# Altium PCB CRYO_ASIC_flex_40pin_adapter.PcbDoc
Units mm, origin at the board's own origin, x right, y up, seen from the top; angles counter-clockwise.
Board outline 49.2 x 49.2 mm, 2 copper layers (Top Layer, Bottom Layer), stack 0.747 mm thick; 8 components, 60 nets, 192 pads, 133 vias.
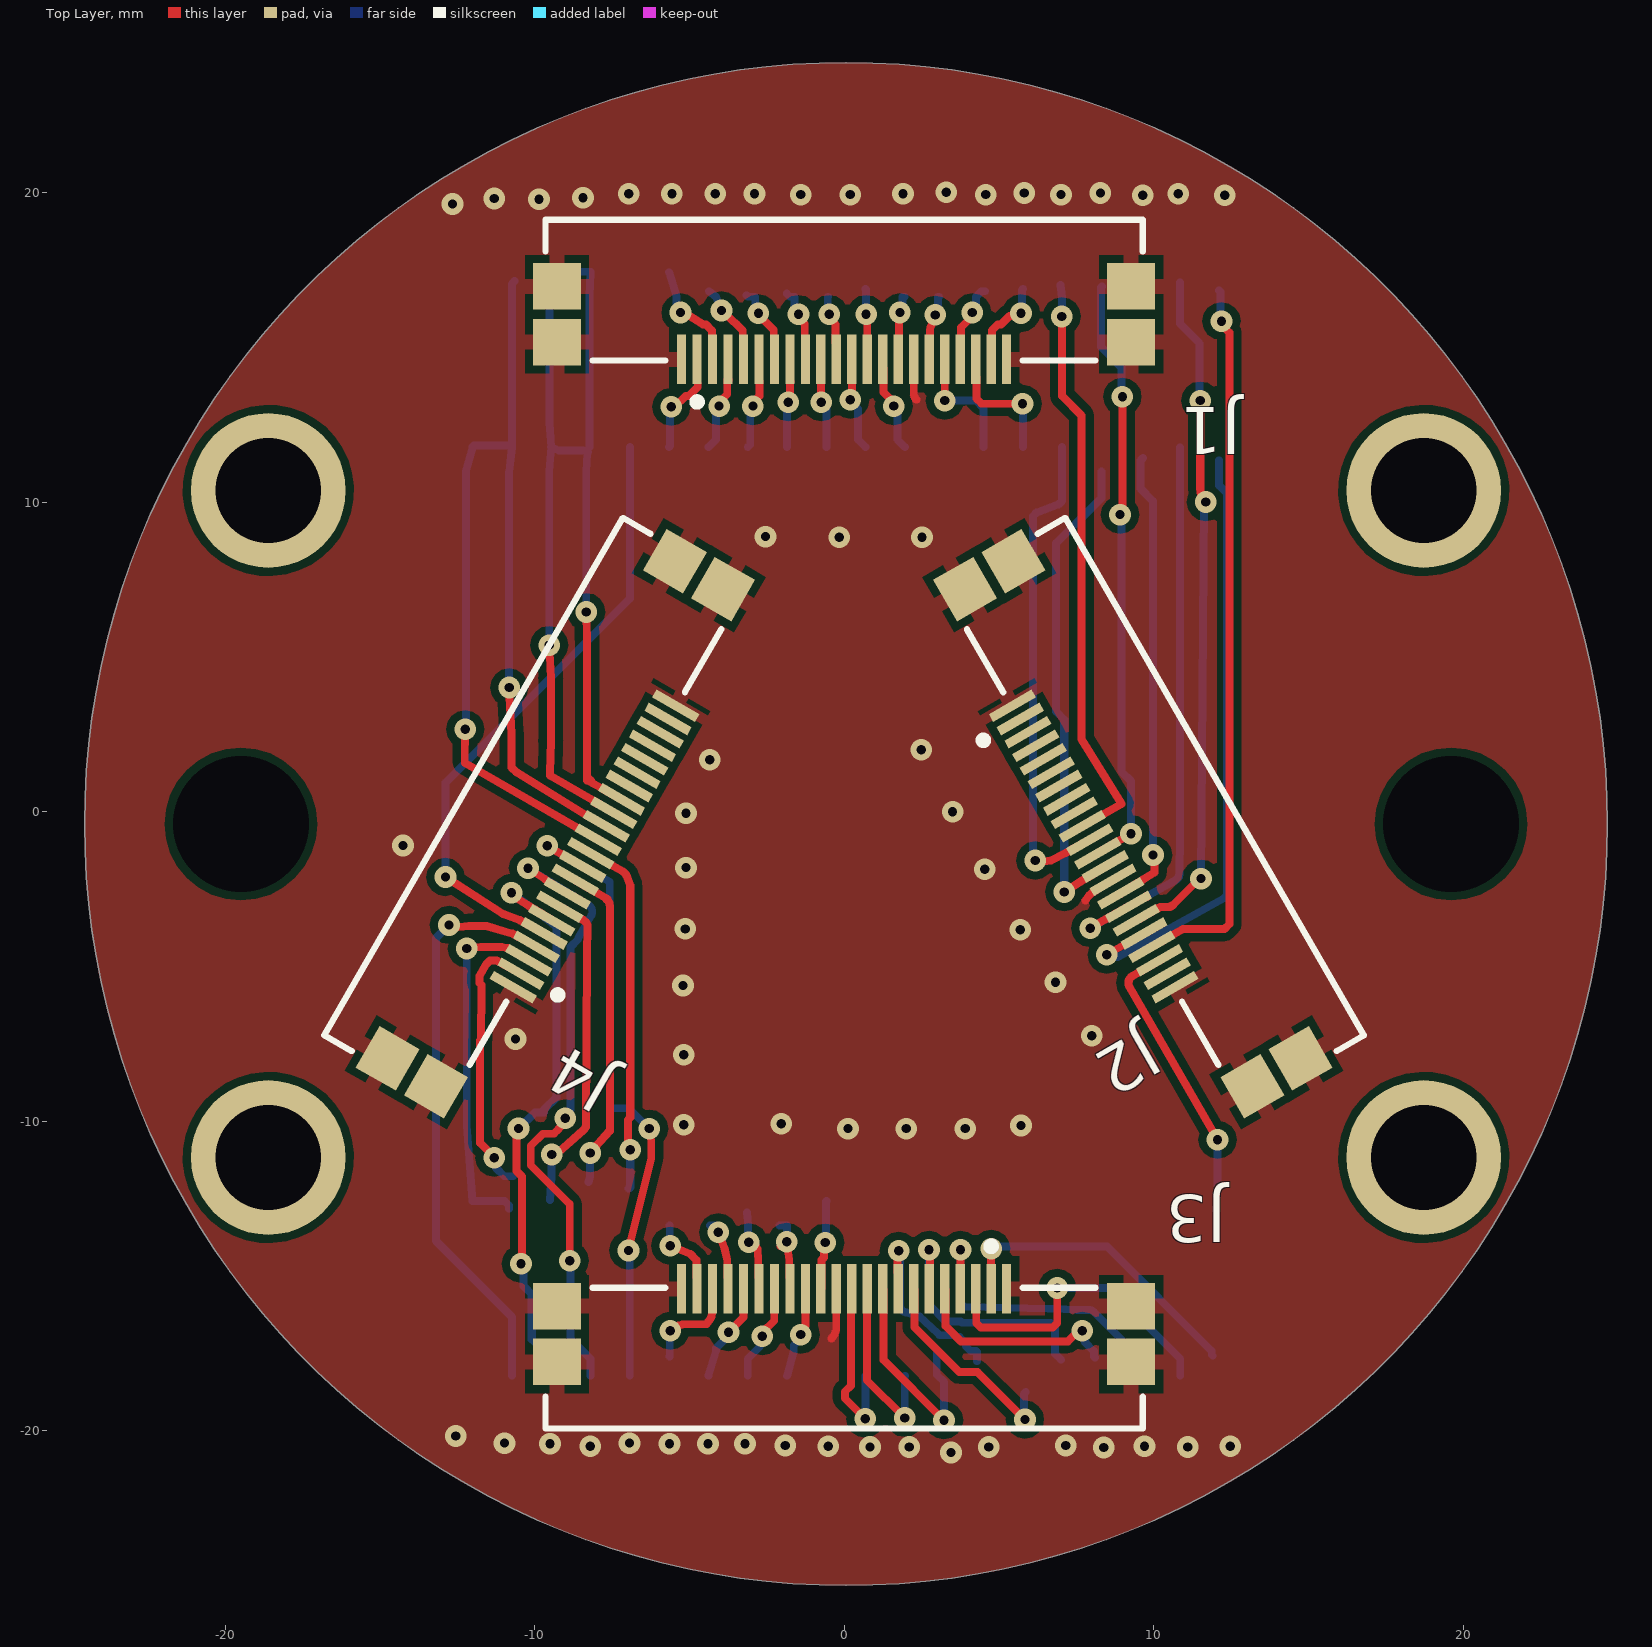
[diagram p0: Top Layer view]
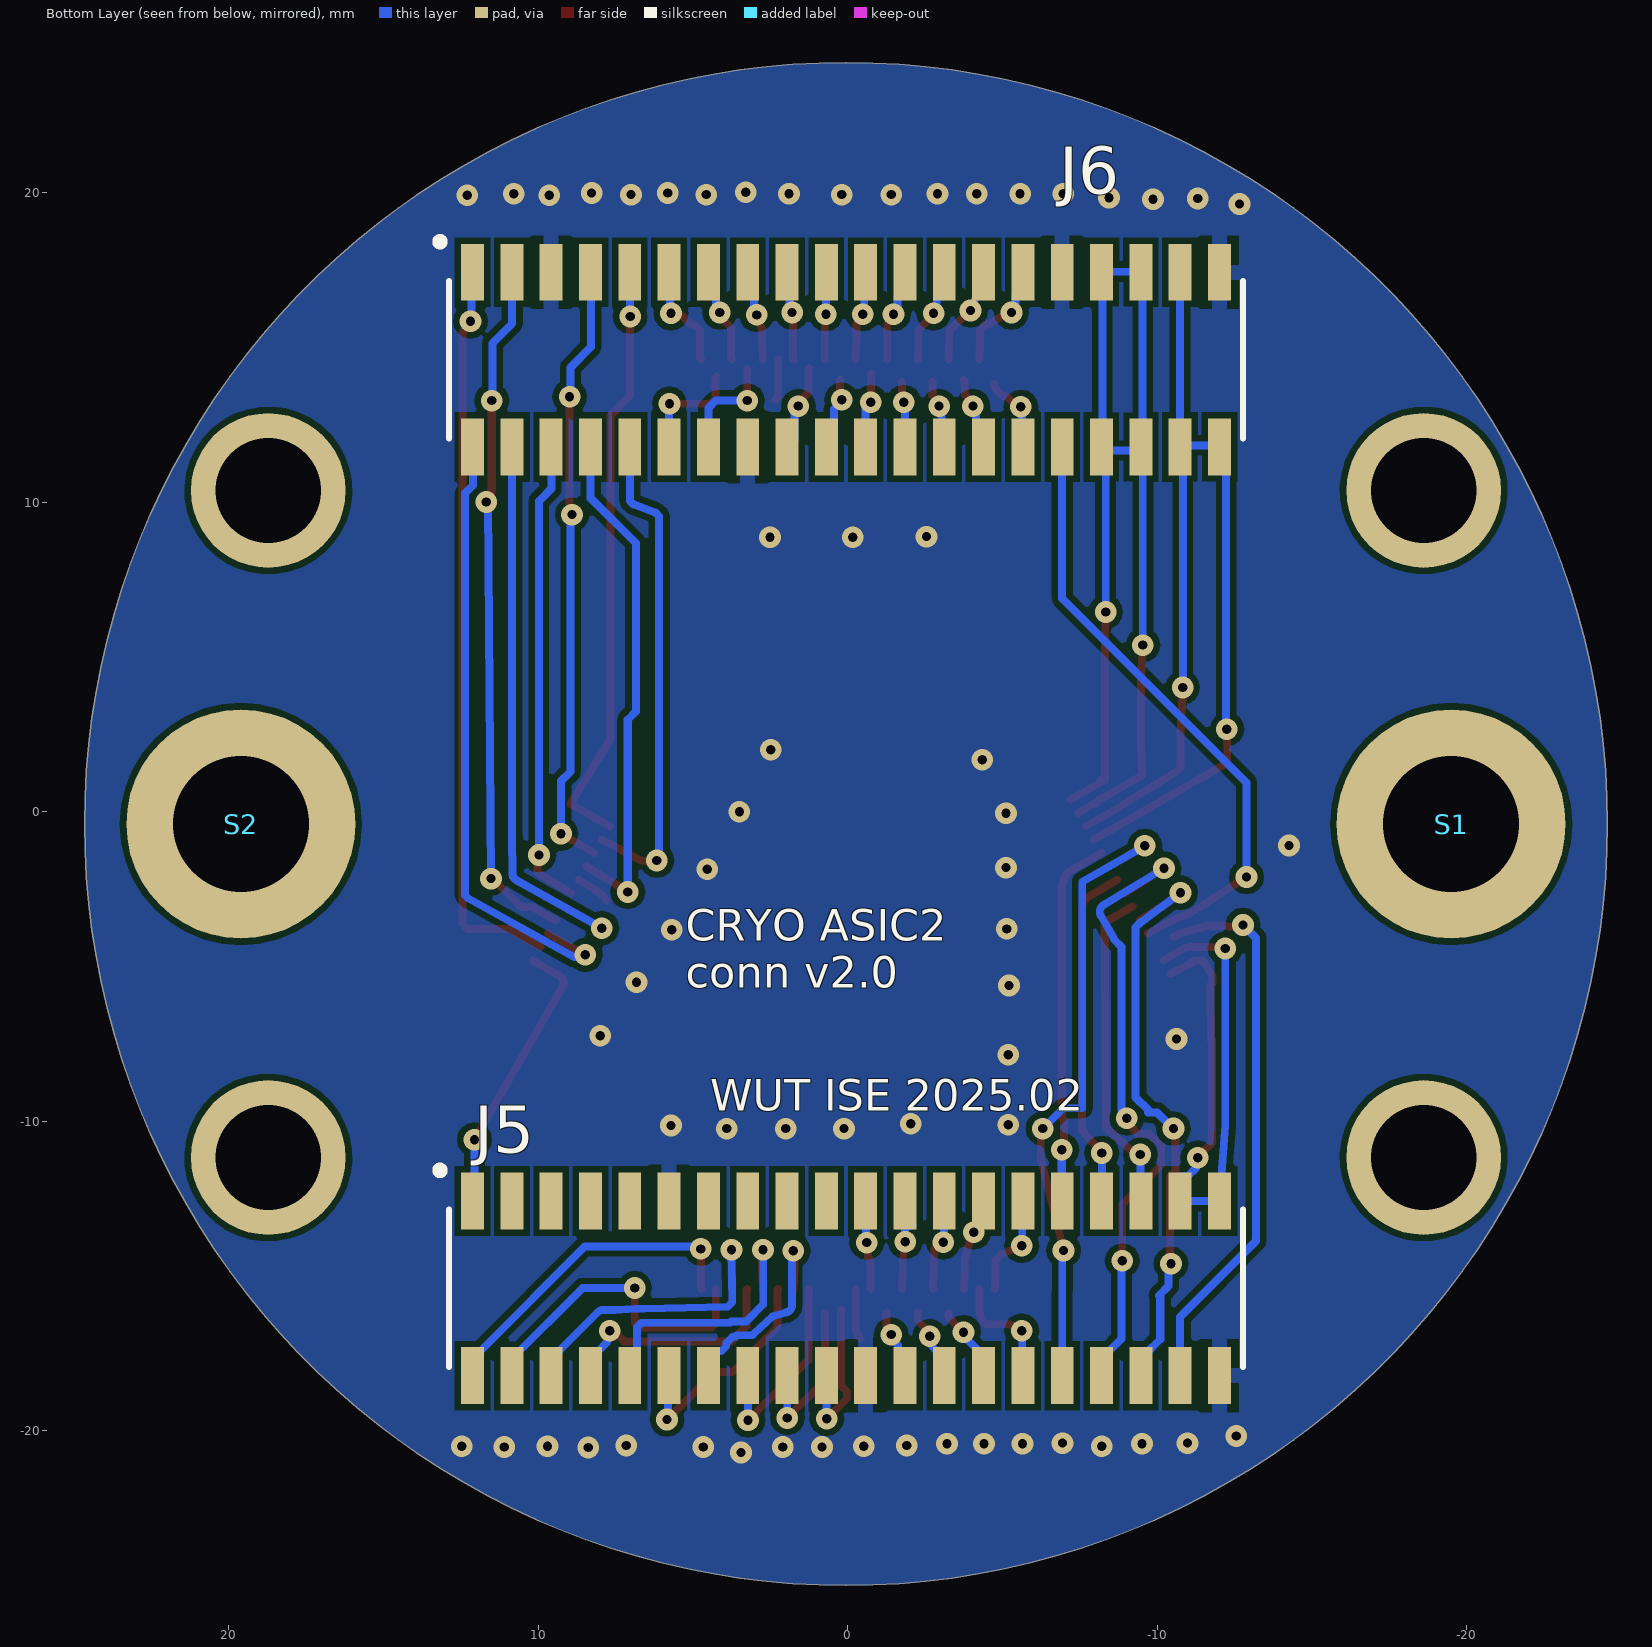
[diagram p1: Bottom Layer view, seen from below]
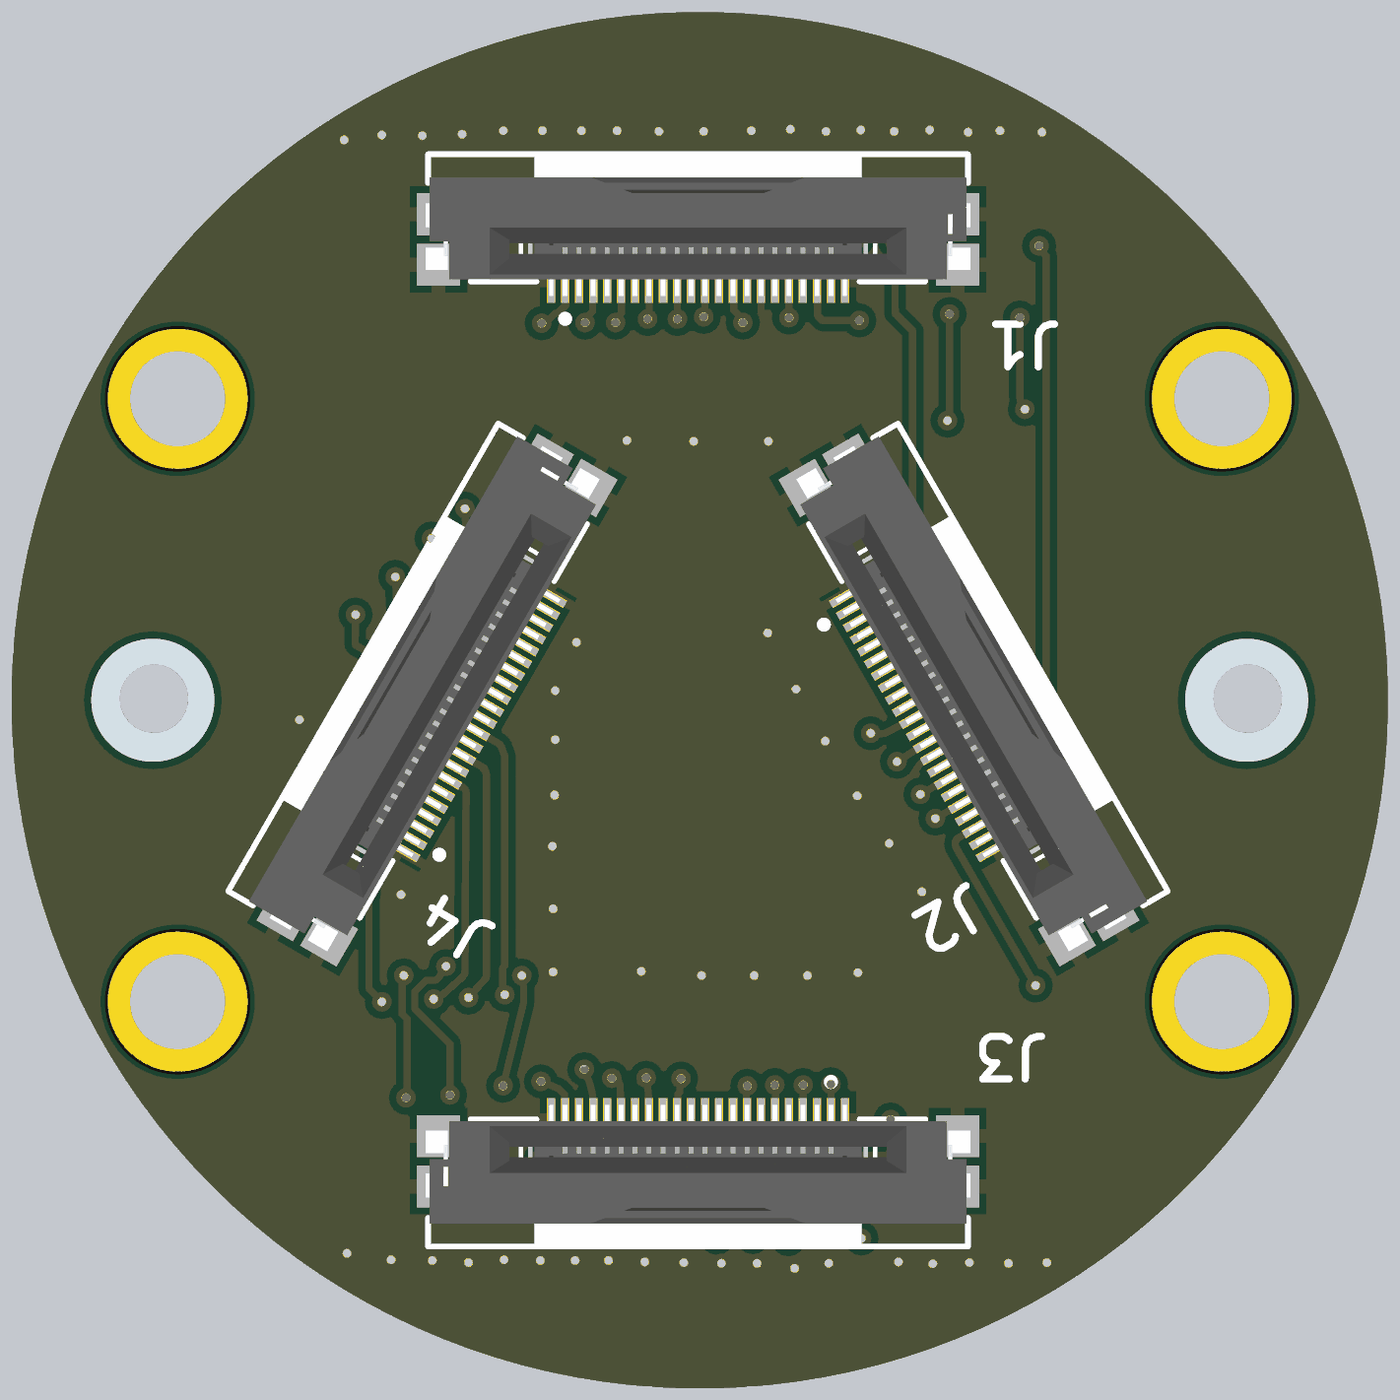
[diagram p2: 3D render of the assembled board from above, using the file's embedded part models]
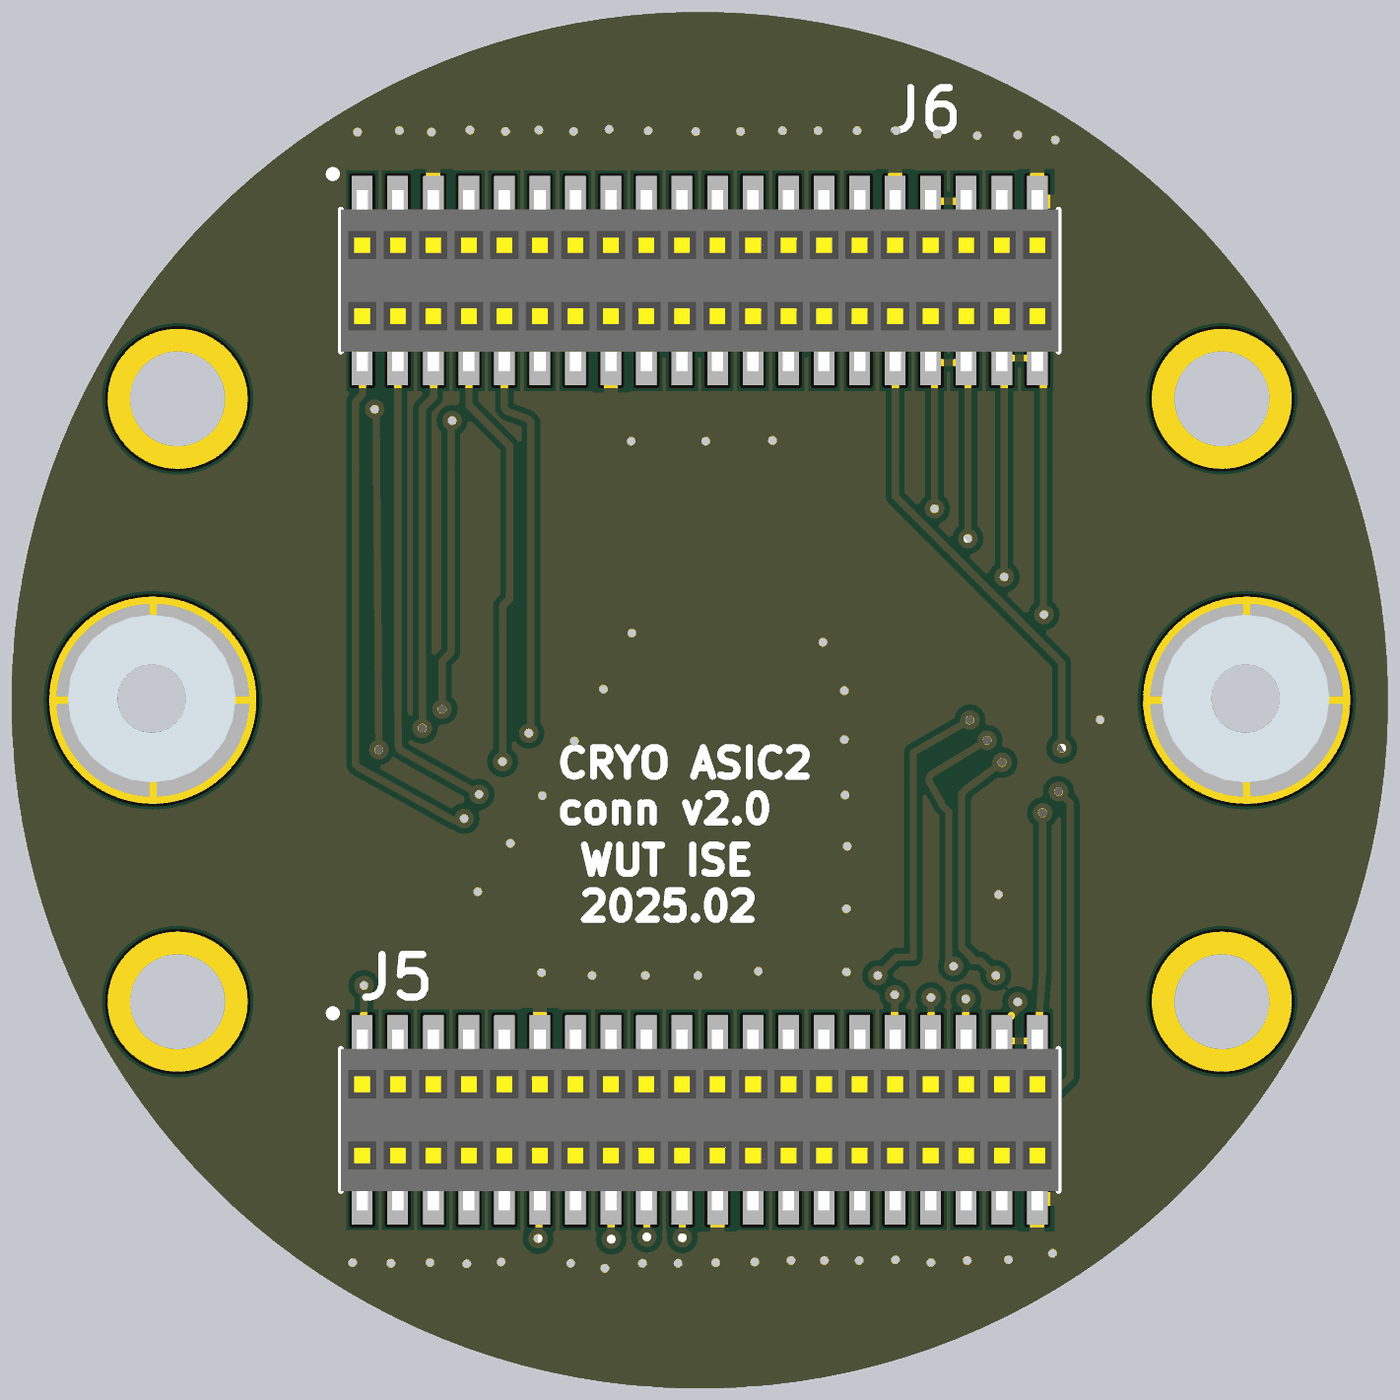
[diagram p3: 3D render of the assembled board from below, using the file's embedded part models]

## Layer stack, top to bottom
Top Solder: solder mask 0.0102, Solder Resist, Dk 3.5
Top Layer: signal copper 0.018
Dielectric 1: core 0.7112, Core-039, Dk 4.8
Bottom Layer: signal copper 0.018
Bottom Solder: solder mask 0.0102, Solder Resist, Dk 3.5

## Board outline
-24.538,-0.395 ccw(c0.062,-0.395) 0.062,-24.995 ccw(c0.062,-0.395) 24.662,-0.395 ccw(c0.062,-0.395) 0.062,24.205 ccw(c0.062,-0.395)

## Design rules (kind name [scope] priority, off if disabled: settings)
Clearance Clearance_2 [InNamedPolygon('GND_L01_P000')] p1: gap=0.254 ignorepadtopadclearanceinfootprint=FALSE
Clearance Clearance_1 [InNamedPolygon('GND_L01_P000')] p2: gap=0.254 ignorepadtopadclearanceinfootprint=TRUE
Clearance [All] p3: gap=0.2 ignorepadtopadclearanceinfootprint=FALSE
DiffPairsRouting [All] p1: maxlimit=0.254 minlimit=0.254 mostfreqgap=0.254 toplayer_minwidth=0.152 toplayer_maxwidth=0.381 toplayer_prefwidth=0.381 bottomlayer_minwidth=0.152 bottomlayer_maxwidth=0.381 bottomlayer_prefwidth=0.381 maxuncoupledlength=12.7
HoleSize [All] p1: absolutevalues=TRUE maxlimit=5.08 minlimit=0.2 maxpercent=80.000 minpercent=20.000
MinimumSolderMaskSliver [All] p1 off: minsoldermaskwidth=0.254
PolygonConnect [All] p1: thpad.connectstyle=Relief thpad.reliefconductorwidth=0.5 thpad.reliefentries=4 thpad.polygonreliefangle="90 Angle" thpad.airgapwidth=0.254 smdpad.connectstyle=Relief smdpad.reliefconductorwidth=0.5 smdpad.reliefentries=4 smdpad.polygonreliefangle="90 Angle" smdpad.airgapwidth=0.254 via.connectstyle=Direct via.reliefconductorwidth=0.5 via.reliefentries=4 via.polygonreliefangle="90 Angle" via.airgapwidth=0.254
RoutingVias [All] p1: holewidth=0.3 width=0.7 viastyle="Through Hole" minholewidth=0.3 minwidth=0.7 maxholewidth=0.3 maxwidth=0.7 viatemplateguid#1={C6DFBB91-ED27-42AF-86C9-B59DD49ECB67} viatemplatename#1=v50h20m0mx0
SilkToSilkClearance [All] p1 off: silktosilkclearance=0.254
SilkToSolderMaskClearance [IsPad] p1 off: minsilkscreentomaskgap=0.254 clearancetoexposedcopper=TRUE
SolderMaskExpansion [All] p1: expansion=0.102 istentingtop=FALSE
SupplyNets "Schematic Supply Nets_3" [InNet('VDD33')] p1: voltage=0.000
SupplyNets "Schematic Supply Nets_2" [InNet('VDDH')] p2: voltage=0.000
SupplyNets "Schematic Supply Nets_1" [InNet('VDD')] p3: voltage=0.000
SupplyNets "Schematic Supply Nets" [InNet('GND')] p4: voltage=0.000
Width [All] p1: maxlimit=0.26 minlimit=0.25 preferedwidth=0.254
25 further rules are at their usual default settings.

## Classes and differential pairs
net class Imax45: P45V0_D16 P45V0_S16
net class Imax30: P3V3_D5 P3V3_S5 P45V0_D8 P45V0_D9 P45V0_D10 P45V0_D11 P45V0_D12 P45V0_D13 P45V0_D14 P45V0_D15 P45V0_D17 P45V0_S8 P45V0_S9 P45V0_S10 P45V0_S11 P45V0_S12 P45V0_S13 P45V0_S14 P45V0_S15 P45V0_S17
net class Imax7: DRAIN_MUX P3V3_D4 P3V3_D6 P3V3_D7 P3V3_S4 P3V3_S6 P3V3_S7
net class Imax5: P1V8_D0 P1V8_D1 P1V8_D2 P1V8_D3 P1V8_S0 P1V8_S1 P1V8_S2 P1V8_S3

## Components (designator, comment, footprint, x,y, rotation, side; value= is the part's Value field where it differs from the comment)
J1 "200485-0720" FP-200485-0720-MFG 0,16.85 r180 top locked
J2 "200485-0720" FP-200485-0720-MFG 10,0 r120 top locked
J3 "200485-0720" FP-200485-0720-MFG 0,-17.65 r0 top locked
J4 "200485-0720" FP-200485-0720-MFG -10,0 r240 top locked
J5 "Socket 40" SAMTEC_RSM-120-02-L-D-K-TR 0.062,-15.395 r180 bottom locked
J6 "Socket 40" SAMTEC_RSM-120-02-L-D-K-TR 0.062,14.605 r180 bottom locked
S1 "9774140360" 9774140360 -19.488,-0.395 r180 bottom
S2 "9774140360" 9774140360 19.612,-0.395 r180 bottom

## Footprints (in the part's own frame and the unit in brackets; to place one, negate y for a bottom-side part, rotate by r counter-clockwise, add the part's x,y. Pads: shape width x height; smd on the part's side, far side on the other; paste and mask are expansions set on the pad)
9774140360 [mm] "SMD Steel Spacer with internal Thread"
  round 7.4 smd paste-576.133: 1(0,0)
  round 0 hole 4.4 unplated: ""(0,0)
  body extent -3.04,-2.94 2.96,3.05, height 14
FP-200485-0720-MFG [mm]
  rect 0.3x1.6 smd paste-1000 mask+0: 1(4.75,2.235) 2(4.25,2.235) 3(3.75,2.235) 4(3.25,2.235) 5(2.75,2.235) 6(2.25,2.235) 7(1.75,2.235) 8(1.25,2.235) 9(0.75,2.235) 10(0.25,2.235) 11(-0.25,2.235) 12(-0.75,2.235) 13(-1.25,2.235) 14(-1.75,2.235) 15(-2.25,2.235) 16(-2.75,2.235) 17(-3.25,2.235) 18(-3.75,2.235) 19(-4.25,2.235) 20(-4.75,2.235) 21(-5.25,2.235) 22(5.25,2.235)
  rect 1.55x1.5 smd paste+0 mask+0: 23(-9.275,1.675) 24(9.275,1.675) 25(-9.275,-0.125) 26(9.275,-0.125)
  silkscreen extent -9.65,-2.27 9.65,3.73, body extent -10.15,-2.37 10.15,3.14, height 0.25
SAMTEC_RSM-120-02-L-D-K-TR [mm] "40 Contacts - Pitch 1.27mm - Dual Row Straight SMD Micro Socket"
  rect 0.74x1.84 smd: 1(-12.065,2.825) 2(-12.065,-2.825) 3(-10.795,2.825) 4(-10.795,-2.825) 5(-9.525,2.825) 6(-9.525,-2.825) 7(-8.255,2.825) 8(-8.255,-2.825) 9(-6.985,2.825) 10(-6.985,-2.825) 11(-5.715,2.825) 12(-5.715,-2.825) 13(-4.445,2.825) 14(-4.445,-2.825) 15(-3.175,2.825) 16(-3.175,-2.825) 17(-1.905,2.825) 18(-1.905,-2.825) 19(-0.635,2.825) 20(-0.635,-2.825) 21(0.635,2.825) 22(0.635,-2.825) 23(1.905,2.825) 24(1.905,-2.825) 25(3.175,2.825) 26(3.175,-2.825) 27(4.445,2.825) 28(4.445,-2.825) 29(5.715,2.825) 30(5.715,-2.825) 31(6.985,2.825) 32(6.985,-2.825) 33(8.255,2.825) 34(8.255,-2.825) 35(9.525,2.825) 36(9.525,-2.825) 37(10.795,2.825) 38(10.795,-2.825) 39(12.065,2.825) 40(12.065,-2.825)
  silkscreen extent -13.24,-2.54 12.83,3.94, body extent -12.83,-3.23 12.83,3.23, height 6.07

## Part data
J1 J2 J3 J4: library part CMP-04775-000032-1, "0.5 ONE-TOUCH ST 20P GND"
J5 J6: library part SAMTEC_RSM-120-02-L-D-K-TR, "Connector 40 Female", Manufacturer=SAMTEC, Manufacturer Part Number=RSM-120-02-L-D-K, Author="CERN DEM JLC", Component Type=Standard, ComponentHeight=6.1mm, CreateDate=09.01.2013, Family="Socket 40", HelpURL=\\cern.ch\dfs\Applications\Altium\Datasheets\SAMTEC_RSM-120-02-L-D-K-TR.pdf, LatestRevisionDate=09.01.2023, Mounted=Yes, Part Description="40 Contacts, Pitch 1.27mm, Dual Row Straight SMD Micro Socket", Part Number=SAMTEC_RSM-120-02-L-D-K-TR, Pin Count=40, PressFit=No, Sense=No, SMD=Yes, Socket=No, Status=None, System=Connector
S1 S2: library part "WA-SMSI,  9774140360", "WA-SMSI SMD Steel Spacer with internal Thread", Manufacturer="Wurth Elektronik", ComponentLink1Description=Manufacturer, ComponentLink1URL=http://www.we-online.de, ComponentLink2Description=Datasheet, ComponentLink2URL=http://katalog.we-online.de/em/datasheet/9774140360.pdf, Created by="Baojun Chen", Created Date=20.Oct.2015, partNo=9774140360

## Free pads (board coordinates)
  round 5 hole 3.4: 3(-18.601,10.38) 4(-18.601,-11.17) 6(18.724,-11.17) 7(18.724,10.38)

## Via types
v1: diameter 0.7, hole 0.3, Top Layer to Bottom Layer, tented both sides, 133 vias

## Nets (pads, with @x,y where several pads share a name; then routed paths per layer and width w, separated by ;. In a path a pad name is that pad's centre, name@x,y a point inside that pad or via, vN(x,y) a via of type N, cw(c..) or ccw(c..) an arc to the next point about the centre after c; other vN are vias at no path point)
BGP_OUT: J2.10 J6.10 | length 15.9
  Top Layer w0.26: v1(6.172,-1.575) 6.208,-1.611 6.426,-1.611 6.689,-1.574 7.16,-1.328 7.349,-1.219 J2.10
  Bottom Layer w0.26: v1(6.172,-1.575) 6.096,-1.498 6.096,9.547 6.212,9.664 6.93,9.928 7.047,10.045 J6.10
CLK: J2.19 J5.1 | length 9.4
  Top Layer w0.26: J2.19 9.611,-5.137 9.318,-5.306 ccw(c9.448,-5.531) 9.223,-5.662 v1(12.065,-10.592)
  Bottom Layer w0.26: J5.1@12.04,-12.878 12.047,-12.568 12.065,-11.78 v1(12.065,-10.592)
DAC_OUT: J2.18 J6.1 | length 23.3
  Top Layer w0.26: J2.18 10.52,-4.031 10.947,-3.785 12.294,-3.785 12.446,-3.632 12.446,15.477 12.192,15.731 v1(12.192,15.85)
  Bottom Layer w0.26: J6.1@12.116,16.84 12.159,16.797 12.159,15.882 v1(12.192,15.85)
DATA_IN: J2.15 J6.4 | length 18.6
  Top Layer w0.26: v1(7.95,-3.759) 8.6,-3.384 J2.15 ; J2.15@9.754,-2.743 J2.15@9.78,-2.748
  Bottom Layer w0.26: v1(7.95,-3.759) 10.033,-2.591 10.706,-2.212 ccw(c10.579,-1.986) 10.839,-1.988 10.85,-0.843 ; 10.85,-0.842 J6.4@10.85,11.773
DATA_RDY: J2.17 J6.2 | length 20
  Top Layer w0.25: v1(8.484,-4.623) 9.102,-4.265 J2.17
  Bottom Layer w0.25: v1(8.484,-4.623) 8.743,-4.697 8.843,-4.697 12.272,-2.792 12.297,-2.767 12.37,-2.694 12.37,10.287 12.116,10.541 J6.2@12.116,11.354
DRAIN_MUX: J2.14 J6.6 | length 14.8
  Top Layer w0.26: J2.14 9.51,-2.281 9.622,-2.216 ccw(c9.457,-1.93) 9.635,-2.208 10.033,-1.956 10.033,-1.585 ccw(c9.946,-1.585) v1@10.008,-1.524 ; v1(9.982,-1.397) v1@10.008,-1.397
  Bottom Layer w0.26: J6.6@9.652,11.43 9.576,11.354 9.576,10.439 9.982,10.033 v1(9.982,-1.397)
GATE_MUX: J2.12 J6.8 | length 15.9
  Top Layer w0.26: v1(7.112,-2.591) 7.719,-2.206 7.869,-2.119 J2.12
  Bottom Layer w0.26: v1(7.112,-2.591) 7.112,2.975 6.852,3.235 6.852,8.681 8.314,10.142 J6.8@8.314,10.99
GND: J1.15 J1.21 J1.22 J1.23 J1.24 J1.25 J1.26 J2.13 J2.21 J2.22 J2.23 J2.24 J2.25 J2.26 J3.11 J3.21 J3.22 J3.23 J3.24 J3.25 J3.26 J4.21 J4.22 J4.23 J4.24 J4.25 J4.26 J5.11 J5.22 J5.40 J6.5 J6.16 J6.31 J6.39 | length 4.1
  Top Layer w0.25: -0.406,-17.018 ccw(c-0.784,-16.64) -0.25,-16.64 J3.11 ; J1.15 2.25,13.519 ccw(c2.546,13.519) 2.337,13.31 ; 7.798,-2.87 7.905,-2.717 cw(c8.172,-2.903) 8.009,-2.622 8.068,-2.587 ccw(c7.944,-2.371) 8.108,-2.559 8.114,-2.554 J2.13
  other v1: 3.454,-20.701 8.391,-20.538 0.838,-20.523 2.108,-20.523 4.674,-20.523 11.1,-20.523 -8.204,-20.498 -0.508,-20.498 9.703,-20.498 12.471,-20.498 -1.905,-20.472 7.163,-20.472 -9.5,-20.422 -5.639,-20.422 -4.394,-20.422 -3.2,-20.422 -10.973,-20.396 -6.934,-20.396 -12.548,-20.168 0.127,-10.236 2.007,-10.236 3.912,-10.236 5.715,-10.135 -5.182,-10.109 -2.032,-10.084 -5.182,-7.849 -10.617,-7.341 8.001,-7.239 -5.207,-5.613 6.833,-5.512 5.69,-3.81 -5.131,-3.785 4.547,-1.854 -5.105,-1.803 -14.249,-1.092 -5.105,-0.051 3.505,0 -4.343,1.676 2.489,2.007 -0.152,8.865 2.515,8.865 -2.54,8.89 -12.649,19.634 -9.855,19.787 -11.303,19.812 -8.433,19.837 9.652,19.914 12.294,19.914 -1.397,19.939 0.203,19.939 4.572,19.939 7.01,19.939 -6.96,19.964 -5.563,19.964 -4.166,19.964 -2.896,19.964 1.905,19.964 10.795,19.964 5.817,19.99 8.28,19.99 3.302,20.015
ICS_OUT: J1.19 J6.12 | length 3.7
  Top Layer w0.254: J1.19@4.242,14.072 4.273,14.04 4.273,13.355 4.445,13.183 v1(5.766,13.183)
  Bottom Layer w0.254: v1(5.766,13.183) 5.777,13.172 J6.12
P1V8_D0: J3.9 J5.18 | length 5.3
  Top Layer w0.25: J3.9@0.737,-16.205 0.737,-18.364 v1(1.956,-19.583)
  Bottom Layer w0.25: v1(1.956,-19.583) 1.961,-19.578 1.961,-18.225 J5.18
P1V8_D1: J3.10 J5.20 | length 5.3
  Top Layer w0.25: J3.10@0.225,-16.09 0.225,-18.543 0.026,-18.742 0.026,-18.949 v1(0.686,-19.609)
  Bottom Layer w0.25: v1(0.686,-19.609) 0.691,-19.603 0.691,-18.225 J5.20
P1V8_D2: J3.13 J5.24 | length 2.2
  Top Layer w0.25: v1(-1.397,-16.891) -1.397,-16.769 -1.245,-16.617 J3.13@-1.245,-16.18
  Bottom Layer w0.25: J5.24 -1.626,-17.425 -1.626,-17.241 -1.397,-17.013 v1(-1.397,-16.891)
P1V8_D3: J3.15 J5.26 | length 2.4
  Top Layer w0.25: v1(-2.642,-16.942) -2.642,-16.82 -2.261,-16.439 J3.15@-2.261,-16.18
  Bottom Layer w0.25: J5.26 -3.113,-17.67 -2.728,-17.284 -2.728,-17.028 v1(-2.642,-16.942)
P1V8_G0: J3.1 J5.2 | length 10
  Top Layer w0.25: J3.1 v1(4.75,-14.122)
  Bottom Layer w0.25: v1(4.75,-14.122) 4.826,-14.046 8.503,-14.046 11.882,-17.425 11.882,-17.546 J5.2@11.913,-17.577
P1V8_G1: J3.2 J5.4 | length 10.4
  Top Layer w0.25: J3.2 4.267,-15.432 4.267,-16.516 4.414,-16.662 6.737,-16.662 6.883,-16.516 v1(6.883,-15.385)
  Bottom Layer w0.25: v1(6.883,-15.385) 8.572,-15.385 10.857,-17.67 J5.4
P1V8_S0: J4.4 J6.32 | length 20
  Top Layer w0.26: v1(-12.878,-2.108) -11.026,-3.296 -10.469,-3.505 -10.28,-3.614 J4.4
  Bottom Layer w0.26: v1(-12.878,-2.108) -12.878,0.94 -6.923,6.894 J6.32
P1V8_S1: J1.17 J6.14 | length 3.6
  Top Layer w0.254: v1(3.251,13.284) J1.17@3.251,14.3
  Bottom Layer w0.254: v1(3.251,13.284) 4.267,13.284 4.507,13.045 J6.14
P1V8_S2: J1.13 J6.18 | length 2.9
  Top Layer w0.254: J1.13@1.26,14.341 1.273,14.328 1.273,13.554 1.6,13.227 v1(1.6,13.106)
  Bottom Layer w0.254: v1(1.6,13.106) 1.6,12.986 1.724,12.862 1.724,12.023 J6.18
P1V8_S3: J1.11 J6.20 | length 2.4
  Top Layer w0.254: v1(0.203,13.31) 0.25,13.356 J1.11@0.25,13.966
  Bottom Layer w0.254: v1(0.203,13.31) 0.203,13.259 0.454,13.008 0.454,12.023 J6.20
P3V3_D4: J3.17 J5.28 | length 2.4
  Top Layer w0.25: v1(-3.736,-16.811) -3.73,-16.811 -3.251,-16.332 J3.17@-3.251,-16.205
  Bottom Layer w0.25: J5.28 -4.138,-17.425 -4.138,-17.336 -3.736,-16.933 v1(-3.736,-16.811)
P3V3_D5: J3.19 J5.30 | length 3.3
  Top Layer w0.254: v1@-5.664,-16.789 cw(c-5.105,-17.348) -5.105,-16.558 -4.45,-16.558 -4.419,-16.512 cw(c-3.859,-16.893) -4.359,-16.436 ccw(c-4.6,-16.215) -4.288,-16.314 -4.281,-16.291 ccw(c-4.916,-16.09) -4.25,-16.09 J3.19
  Bottom Layer w0.254: J5.30@-5.639,-17.602 -5.633,-17.597 -5.633,-16.784 v1(-5.613,-16.764)
P3V3_D6: J4.9 J5.32 | length 20.1
  Top Layer w0.25: v1(-9.595,-1.102) -9.025,-1.431 J4.9@-8.966,-1.473 ; v1(-6.967,-14.173) -6.234,-11.202 -6.234,-10.642 v1(-6.299,-10.236)
  Bottom Layer w0.25: v1@-9.601,-1.143 v1(-9.595,-1.102) -7.571,-2.261 -7.571,-9.576 -6.96,-9.576 v1(-6.299,-10.236) ; v1(-6.967,-14.173) -6.929,-14.212 -6.929,-15.489 ; J5.32 -6.923,-15.494
P3V3_D7: J4.7 J5.34 | length 20.7
  Top Layer w0.25: v1(-10.211,-1.829) -9.68,-2.166 -9.657,-2.19 -9.512,-2.274 J4.7@-8.945,-2.634 ; v1(-9.01,-9.904) -9.01,-10.025 -9.228,-10.243 -9.228,-10.253 -9.374,-10.399 -9.728,-10.399 -10.124,-10.795 -10.124,-11.415 -8.865,-12.675 v1(-8.865,-14.503)
  Bottom Layer w0.25: v1(-10.211,-1.829) -8.255,-3.013 cw(c-8.385,-3.227) -8.168,-3.351 -8.578,-4.068 ; v1(-9.01,-9.904) -9.01,-9.797 -8.839,-9.627 -8.839,-4.369 -8.585,-4.115 ; v1@-8.839,-14.503 -8.839,-17.024 -8.193,-17.67 J5.34
P3V3_G2: J3.3 J5.6 | length 10.1
  Top Layer w0.25: J3.3 3.759,-14.74 v1(3.759,-14.148)
  Bottom Layer w0.25: v1(3.759,-14.148) 3.738,-15.807 3.739,-15.841 3.885,-15.988 6.604,-16.06 6.853,-16.06 7.544,-16.093 7.906,-16.093 cw(c7.906,-16.343) 8.083,-16.167 9.587,-17.67 J5.6
P3V3_G3: J3.4 J5.8 | length 7
  Top Layer w0.25: J3.4 3.275,-15.44 3.275,-16.61 3.777,-17.112 7.23,-17.112 7.574,-16.768 v1(7.696,-16.768)
  Bottom Layer w0.25: v1(7.696,-16.768) 7.782,-16.854 7.782,-17.136 8.072,-17.425 8.072,-17.597 J5.8@8.103,-17.628
P3V3_S4: J1.9 J6.22 | length 2.4
  Top Layer w0.254: J1.9@-0.762,14.148 -0.743,14.129 -0.743,13.24 v1(-0.737,13.233)
  Bottom Layer w0.254: v1(-0.737,13.233) -0.573,13.07 J6.22
P3V3_S5: J1.2 J6.29 | length 3.5
  Top Layer w0.254: v1(-5.283,16.129) -5.163,16.129 -4.554,15.742 -4.465,15.742 -4.273,15.55 -4.273,15.288 J1.2
  Bottom Layer w0.254: J6.29 -5.41,16.637 -5.41,16.377 -5.283,16.25 v1(-5.283,16.129)
P3V3_S6: J1.5 J6.26 | length 2.3
  Top Layer w0.254: v1(-2.946,13.106) -2.946,13.227 -2.737,13.436 J1.5@-2.737,13.9
  Bottom Layer w0.254: J6.26 -3.03,11.863 -3.03,13.023 v1(-2.946,13.106)
P3V3_S7: J1.7 J6.24 | length 2.2
  Top Layer w0.254: v1(-1.803,13.233) -1.747,13.29 -1.747,13.874 J1.7@-1.727,13.894
  Bottom Layer w0.254: J6.24 -1.843,13.168 -1.803,13.208 v1(-1.803,13.233)
P18V0_G4: J3.5 J5.10 | length 8.6
  Top Layer w0.25: v1(2.743,-14.148) 2.775,-14.18 2.775,-14.74 J3.5
  Bottom Layer w0.25: 2.733,-15.006 2.733,-15.023 2.733,-15.915 3.284,-16.466 3.766,-16.466 3.809,-16.51 6.667,-16.51 6.813,-16.656 6.813,-17.507 J5.10@7.01,-17.704 ; 2.733,-15.005 2.733,-14.158 v1(2.743,-14.148)
P18V0_G5: J3.6 J5.12 | length 7
  Top Layer w0.25: J3.6 2.275,-15.44 2.275,-16.65 3.724,-18.099 4.307,-18.099 v1(5.842,-19.634)
  Bottom Layer w0.25: v1(5.842,-19.634) 5.809,-19.602 5.809,-18.803 J5.12@5.867,-18.745
P18V0_G6: J3.7 J5.14 | length 6.5
  Top Layer w0.25: J3.7 1.727,-14.74 1.727,-14.216 v1(1.764,-14.18)
  Bottom Layer w0.25: v1(1.764,-14.18) 1.803,-14.22 1.803,-15.932 ccw(c2.053,-15.932) 1.995,-16.175 cw(c1.856,-16.761) 2.019,-16.181 2.433,-16.297 3.022,-16.849 3.094,-16.916 3.193,-16.916 3.579,-16.916 3.623,-16.96 3.726,-16.96 3.932,-17.165 3.932,-17.269 4.088,-17.425 4.262,-17.425 4.293,-17.456 J5.14@4.293,-17.755
P18V0_G7: J3.8 J5.16 | length 7.4
  Top Layer w0.25: J3.8 1.275,-15.44 1.275,-17.709 v1(3.226,-19.66)
  Bottom Layer w0.25: J5.16@2.997,-17.45 2.997,-18.183 3.231,-18.417 3.231,-19.654 v1(3.226,-19.66)
P45V0_D8: J4.3 J5.38 | length 17.9
  Top Layer w0.26: v1@-12.624,-3.734 -12.118,-3.689 -11.555,-3.689 -10.719,-3.938 -10.53,-4.047 J4.3@-10.524,-4.037
  Bottom Layer w0.26: v1(-12.764,-3.658) -13.185,-4.078 -13.185,-13.866 -10.733,-16.318 J5.38
P45V0_D9: J4.5 J5.36 | length 18.4
  Top Layer w0.26: v1(-10.744,-2.616) -10.736,-2.668 -10.658,-2.746 -10.176,-3.044 -10.16,-3.06 -10.01,-3.147 J4.5 ; v1(-10.518,-10.234) -10.579,-10.295 -10.579,-11.604 -10.401,-11.781 -10.401,-14.567 v1(-10.439,-14.605)
  Bottom Layer w0.26: v1(-10.744,-2.616) -9.464,-3.569 cw(c-9.619,-3.777) -9.435,-3.593 -9.296,-3.732 -9.296,-9.229 -9.69,-9.622 -9.69,-9.715 -9.99,-9.715 -10.509,-10.234 v1(-10.518,-10.234) ; v1(-10.439,-14.605) -10.355,-14.689 -10.355,-15.324 -10.058,-15.621 ; -10.09,-15.621 -10.09,-17.043 -9.633,-17.501 J5.36@-9.576,-17.501
P45V0_D10: J3.12 J5.21 | length 3
  Top Layer w0.254: J3.12 -0.727,-15.392 -0.727,-14.622 -0.727,-14.48 -0.651,-14.404 -0.651,-13.961 v1(-0.61,-13.919)
  Bottom Layer w0.26: v1@-0.729,-13.919 v1(-0.61,-13.919) -0.591,-13.901 -0.591,-12.588 J5.21
P45V0_D11: J3.14 J5.23 | length 2.6
  Top Layer w0.254: v1@-2.063,-14.038 v1(-1.854,-13.894) -1.773,-14.48 -1.773,-14.742 J3.14
  Bottom Layer w0.254: J5.23@-2.086,-13.363 -1.849,-13.363 -1.849,-13.888 v1(-1.854,-13.894)
P45V0_D12: J3.16 J5.25 | length 2.8
  Top Layer w0.254: v1(-3.084,-13.906) -2.919,-13.957 -2.839,-14.036 -2.794,-14.122 -2.773,-14.478 ; -2.773,-14.48 -2.773,-14.742 J3.16
  Bottom Layer w0.254: J5.25@-3.131,-12.947 -3.099,-13.363 v1@-3.099,-14.072
P45V0_D13: J3.18 J5.27 | length 2.3
  Top Layer w0.254: v1(-4.066,-13.587) -3.865,-14.103 -3.773,-14.48 -3.773,-14.742 J3.18
  Bottom Layer w0.254: J5.27@-4.338,-13.363 -4.151,-13.363 -4.151,-13.502 v1(-4.066,-13.587)
P45V0_D14: J3.20 J5.29 | length 2.6
  Top Layer w0.254: v1(-5.613,-14.021) -4.965,-14.288 -4.773,-14.48 -4.773,-14.742 J3.20
  Bottom Layer w0.254: J5.29@-5.639,-13.363 -5.633,-13.363 -5.633,-14.001 v1(-5.613,-14.021)
P45V0_D15: J4.10 J5.31 | length 11.6
  Top Layer w0.26: J4.10 -7.607,-1.666 -7.142,-1.935 ; -7.141,-1.935 cw(c-7.272,-2.16) -7.028,-2.068 -6.909,-2.388 -6.909,-9.884 -6.979,-9.955 -6.979,-10.852 v1(-6.909,-10.922)
  Bottom Layer w0.26: J5.31@-6.96,-12.167 ccw(c-6.96,-12.116) -6.909,-12.116 v1(-6.909,-10.922)
P45V0_D16: J4.8 J5.33 | length 10.6
  Top Layer w0.26: J4.8 -8.116,-2.547 -7.645,-2.819 ; v1(-8.204,-11.024) -7.569,-10.312 -7.569,-3.04 ccw(c-7.829,-3.04) -7.691,-2.82
  Bottom Layer w0.26: J5.33@-8.255,-11.963 -8.204,-11.78 v1(-8.204,-11.024)
P45V0_D17: J4.6 J5.35 | length 10.6
  Top Layer w0.26: v1(-9.449,-11.074) ccw(c-9.408,-10.818) -9.235,-11.012 -8.42,-10.29 ccw(c-8.593,-10.095) -8.333,-10.093 ; J4.6 -8.605,-3.394 -8.414,-3.505 ; -8.413,-3.505 cw(c-8.544,-3.73) -8.284,-3.735 -8.301,-4.566 ; -8.331,-10.16 -8.301,-4.571
  Bottom Layer w0.26: J5.35@-9.5,-12.548 -9.449,-11.78 v1(-9.449,-11.074)
P45V0_S8: J1.8 J6.23 | length 2.5
  Top Layer w0.254: v1(-1.473,16.078) -1.473,15.958 -1.273,15.757 -1.273,14.638 J1.8
  Bottom Layer w0.254: J6.23@-1.854,16.739 -1.753,16.637 -1.6,16.637 -1.6,16.326 -1.473,16.199 v1(-1.473,16.078)
P45V0_S9: J1.10 J6.21 | length 2.1
  Top Layer w0.254: v1(-0.483,16.078) -0.483,15.958 -0.273,15.748 -0.273,15.288 J1.10
  Bottom Layer w0.254: J6.21@-0.523,16.637 -0.528,16.637 -0.528,16.124 v1(-0.483,16.078)
P45V0_S10: J1.12 J6.19 | length 2.3
  Top Layer w0.254: v1(0.711,16.078) 0.75,16.039 J1.12
  Bottom Layer w0.254: J6.19@0.686,16.891 0.704,16.873 0.704,16.085 v1(0.711,16.078)
P45V0_S11: J1.14 J6.17 | length 2.1
  Top Layer w0.254: J1.14 1.773,14.638 1.773,16.099 v1(1.803,16.129)
  Bottom Layer w0.254: v1(1.803,16.129) 1.885,16.211 1.885,16.637 J6.17@1.95,16.637
P45V0_S12: J1.16 J6.15 | length 2.2
  Top Layer w0.254: J1.16 2.773,15.288 2.773,15.55 2.786,15.654 2.853,15.777 2.861,15.785 2.861,15.967 v1(2.946,16.053)
  Bottom Layer w0.254: v1(2.946,16.053) 3.032,16.138 3.032,16.637 J6.15@3.072,16.637
P45V0_S13: J1.18 J6.13 | length 2.6
  Top Layer w0.254: J1.18 3.773,14.638 3.773,15.641 4.14,16.008 v1(4.14,16.129)
  Bottom Layer w0.254: v1(4.14,16.129) 4.14,16.25 4.264,16.373 4.264,16.637 4.441,16.815 J6.13@4.547,16.815
P45V0_S14: J1.20 J6.11 | length 2.9
  Top Layer w0.254: J1.20 4.773,14.638 4.773,15.55 4.965,15.742 5.068,15.742 5.344,16.018 5.63,16.018 v1(5.715,16.104)
  Bottom Layer w0.254: v1(5.715,16.104) 5.746,16.134 5.746,16.86 J6.11@5.784,16.898
P45V0_S15: J2.9 J6.9 | length 18.9
  Top Layer w0.26: v1(7.036,16.002) 7.047,13.433 7.674,12.806 7.674,2.342 8.964,0.258 ; J2.9 8.274,-0.14 8.964,0.258 ; 8.966,0.254 8.964,0.258
  Bottom Layer w0.26: J6.9@6.985,17.018 7.036,16.64 v1(7.036,16.002)
P45V0_S16: J2.11 J6.7 | length 19.4
  Top Layer w0.26: J2.11 8.77,-1 v1(9.271,-0.711) ; v1(8.915,9.601) ccw(c8.731,9.785) 8.992,9.785 v1(8.992,13.411)
  Bottom Layer w0.26: J6.7@8.331,16.967 8.306,16.942 8.306,15.011 8.96,14.358 8.96,13.488 ccw(c9.069,13.488) v1(8.992,13.411) ; 8.96,1.321 v1@8.96,9.601 ; 8.966,1.321 8.966,1.295 9.271,0.991 v1(9.271,-0.711)
P45V0_S17: J2.16 J6.3 | length 22.1
  Top Layer w0.26: J2.16 9.535,-3.467 10.142,-3.116 cw(c10.307,-3.402) 10.322,-3.073 10.442,-3.078 ccw(c10.454,-2.818) 10.636,-3.004 v1@11.506,-2.134 ; v1(11.506,13.284) 11.506,10.437 ccw(c12.113,10.437) v1(11.684,10.008)
  Bottom Layer w0.26: J6.3@10.846,17.094 10.846,15.773 11.484,15.136 11.484,13.339 ccw(c11.561,13.339) v1(11.506,13.284) ; v1(11.532,-2.159) v1@11.628,10.018
Thermometer_1_1: J1.6 J6.25 | length 2.6
  Top Layer w0.254: v1(-2.769,16.104) -2.769,16.061 -2.273,15.565 -2.273,14.638 J1.6
  Bottom Layer w0.254: J6.25@-3.15,16.688 -3.099,16.637 -2.87,16.637 -2.87,16.326 -2.769,16.224 v1(-2.769,16.104)
Thermometer_1_2: J1.1 J6.30 | length 2.5
  Top Layer w0.254: v1(-5.588,13.081) -5.467,13.081 -5.114,13.434 -5.019,13.434 -4.727,13.726 J1.1@-4.727,13.818
  Bottom Layer w0.254: J6.30 -5.621,11.813 -5.621,13.048 v1(-5.588,13.081)
Thermometer_1_3: J1.3 J6.28 | length 2.5
  Top Layer w0.254: v1(-4.039,13.106) -4.039,13.227 -3.773,13.493 -3.773,13.942 -3.77,13.945 J1.3@-3.734,13.945
  Bottom Layer w0.254: J6.28 -4.14,12.023 -4.14,12.884 -4.039,12.986 v1(-4.039,13.106)
Thermometer_1_4: J1.4 J6.27 | length 2.6
  Top Layer w0.254: v1(-3.963,16.197) -3.465,15.742 -3.273,15.55 -3.273,15.288 J1.4
  Bottom Layer w0.254: J6.27@-4.369,16.815 -4.14,16.637 v1(-3.963,16.197)
VDD: J4.13 J4.14 J6.33 J6.34 J6.35 J6.36 | length 38.9
  Top Layer w0.254: v1(-9.525,5.385) -9.474,4.317 cw(c-9.728,4.305) -9.474,4.305 -9.474,2.289 cw(c-9.728,2.289) -9.474,2.284 ; -9.5,1.168 -8.016,0.312 J4.13 ; -9.496,1.272 -9.474,2.283 ; v1(-8.331,6.452) -8.303,5.602 cw(c-8.557,5.594) -8.303,5.594 -8.303,1.422 -8.306,1.016 ; -8.303,1.126 -8.193,1.016 -8.184,1.016 ; -8.28,1.016 -7.777,0.726 J4.14 ; J4.13@-8.034,0.282 J4.13@-7.874,0.229
  Bottom Layer w0.254: v1(-9.525,5.385) -9.525,10.987 J6.36 ; J6.35@-9.525,17.429 -9.516,16.637 -9.516,12.573 J6.36 ; J6.35 -9.22,17.445 -8.436,17.445 J6.33@-8.194,17.448 ; v1(-8.331,6.452) -8.331,10.987 -8.3,11.588 J6.34@-8.268,11.62 ; J6.34@-8.306,11.659 -8.436,11.672 -9.22,11.672 J6.36 ; J6.34@-8.23,11.78 -8.23,16.637 J6.33
VDD33: J4.11 J4.12 J6.37 J6.38 J6.40 | length 35.8
  Top Layer w0.254: -12.254,1.6 v1(-12.243,2.667) ; -12.242,1.575 -8.526,-0.57 J4.11 ; v1(-10.82,4.013) -10.745,2.509 cw(c-10.998,2.497) -10.744,2.497 -10.744,1.429 -10.595,1.286 -8.278,-0.141 J4.12
  Bottom Layer w0.254: v1@-12.217,2.667 -12.217,10.987 J6.40 ; J6.40@-11.963,11.836 -10.79,11.836 J6.38 ; v1(-10.82,4.013) -10.82,10.987 J6.38 ; J6.37@-10.643,17.145 -10.733,17.054 J6.38
VDDH: J4.1 J4.2 J5.37 J5.39 | length 20.5
  Top Layer w0.254: v1(-12.192,-4.42) -11.726,-4.372 -11.065,-4.372 -10.865,-4.407 -10.772,-4.461 J4.2 ; v1(-11.303,-11.176) -11.303,-11.159 -11.758,-10.704 -11.758,-7.389 -11.735,-7.365 -11.715,-5.707 -11.715,-5.6 -11.784,-5.529 -11.784,-5.306 -11.569,-4.933 -11.443,-4.807 -11.22,-4.807 -11.034,-4.915 J4.1
  Bottom Layer w0.254: v1(-12.192,-4.42) -12.192,-10.142 J5.39 -10.976,-12.57 -10.82,-12.726 J5.37@-10.82,-12.827 ; v1(-11.303,-11.176) -11.246,-11.233 -11.246,-11.507 -10.976,-11.777 J5.37@-10.693,-11.777
pads on no net: J2.1 J2.2 J2.3 J2.4 J2.5 J2.6 J2.7 J2.8 J2.20 J4.15 J4.16 J4.17 J4.18 J4.19 J4.20 J5.3 J5.5 J5.7 J5.9 J5.13 J5.15 J5.17 J5.19 S1. S1.1 S2. S2.1

## Polygon pours and split planes (outlines as drawn)
GND on Top Layer "GND_L01_P000" (solid, remove dead copper, pour order 0): -24.538,-0.395 ccw(c0.062,-0.395) 0.062,-24.995 ccw(c0.062,-0.395) 24.662,-0.395 ccw(c0.062,-0.395) 0.062,24.205 ccw(c0.062,-0.395)
GND on Bottom Layer "GND_L02_P001" (solid, pour order 1): -24.538,-0.395 ccw(c0.062,-0.395) 0.062,-24.995 ccw(c0.062,-0.395) 24.662,-0.395 ccw(c0.062,-0.395) 0.062,24.205 ccw(c0.062,-0.395)

## Silkscreen, mask and mechanical layers (free items; w line width, h text height)
Bottom Overlay:
  text "CRYO ASIC2 / conn v2.0" at 5.232,-5.69 h1.02
  text "WUT ISE 2025.02" at 4.445,-9.652 h1.02
Mechanical 1:
  lines w0.05: -24.938,-0.395 cw(c0.062,-0.395) 0.062,24.605 cw(c0.062,-0.395) 25.062,-0.395 cw(c0.062,-0.395) 0.062,-25.395 cw(c0.062,-0.395) -24.938,-0.395